# EAGLE board ANAL_1_STEP_V1_1B (EAGLE 7.6.0)
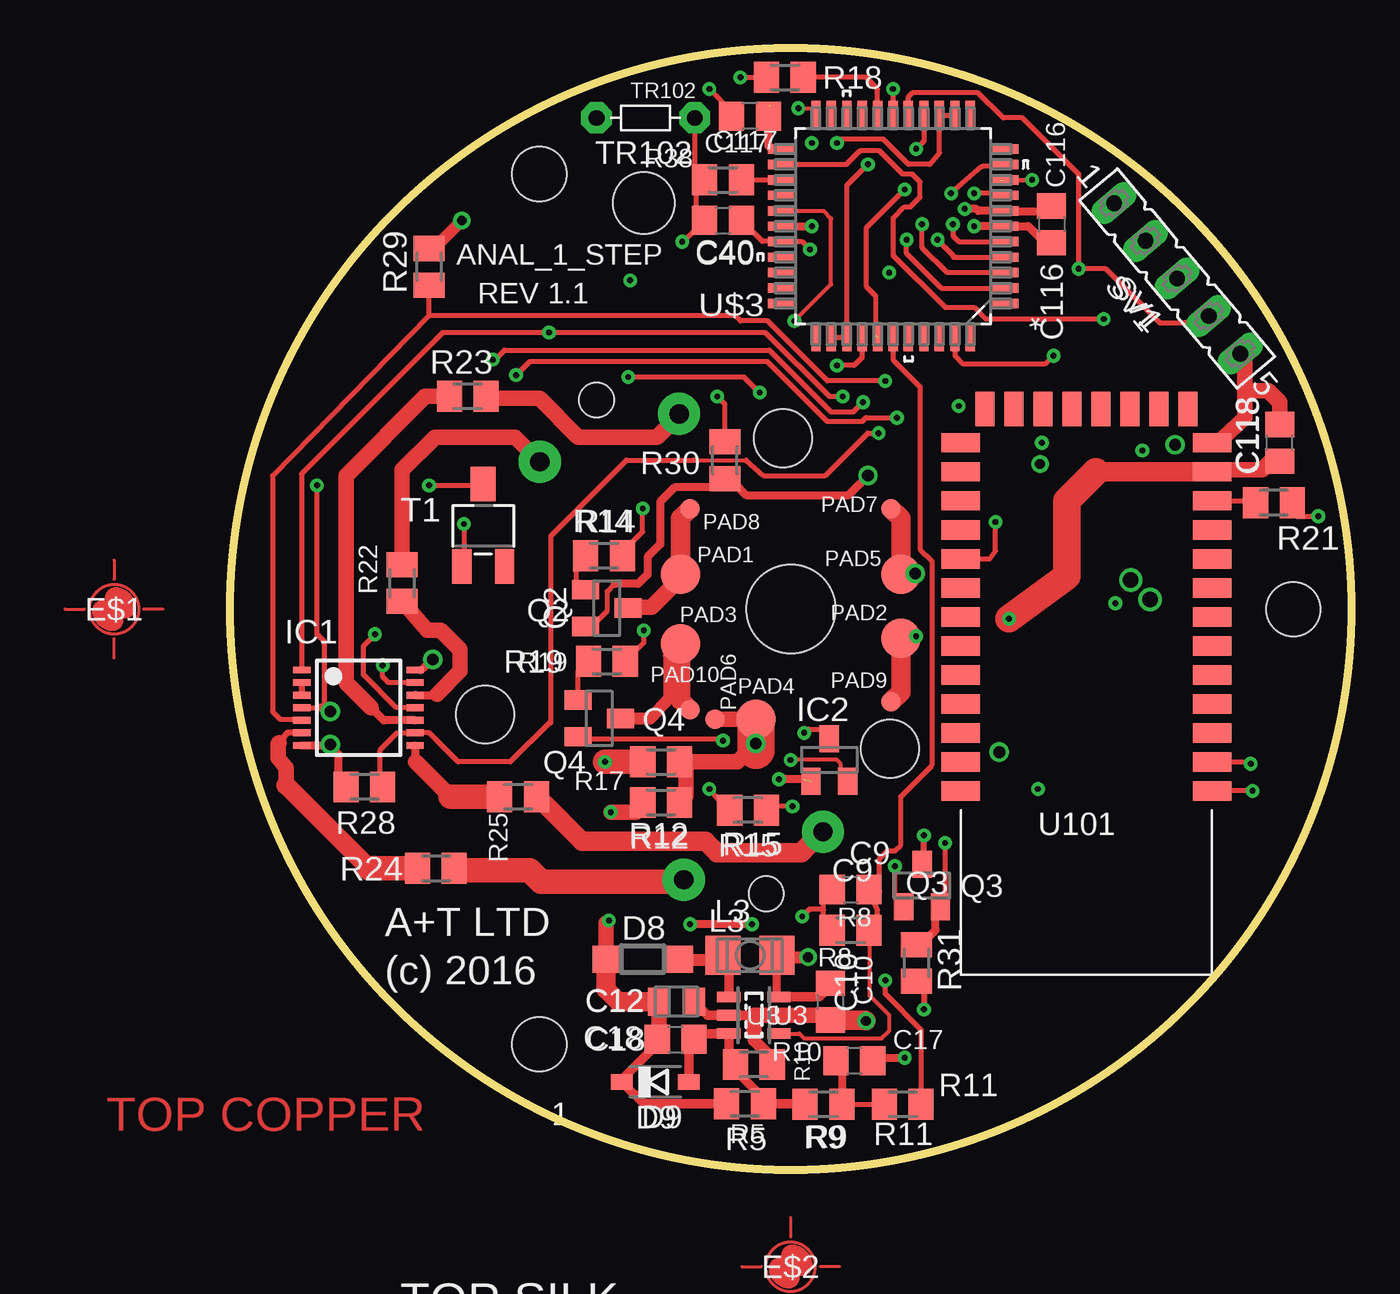
[diagram p0: board, top side]
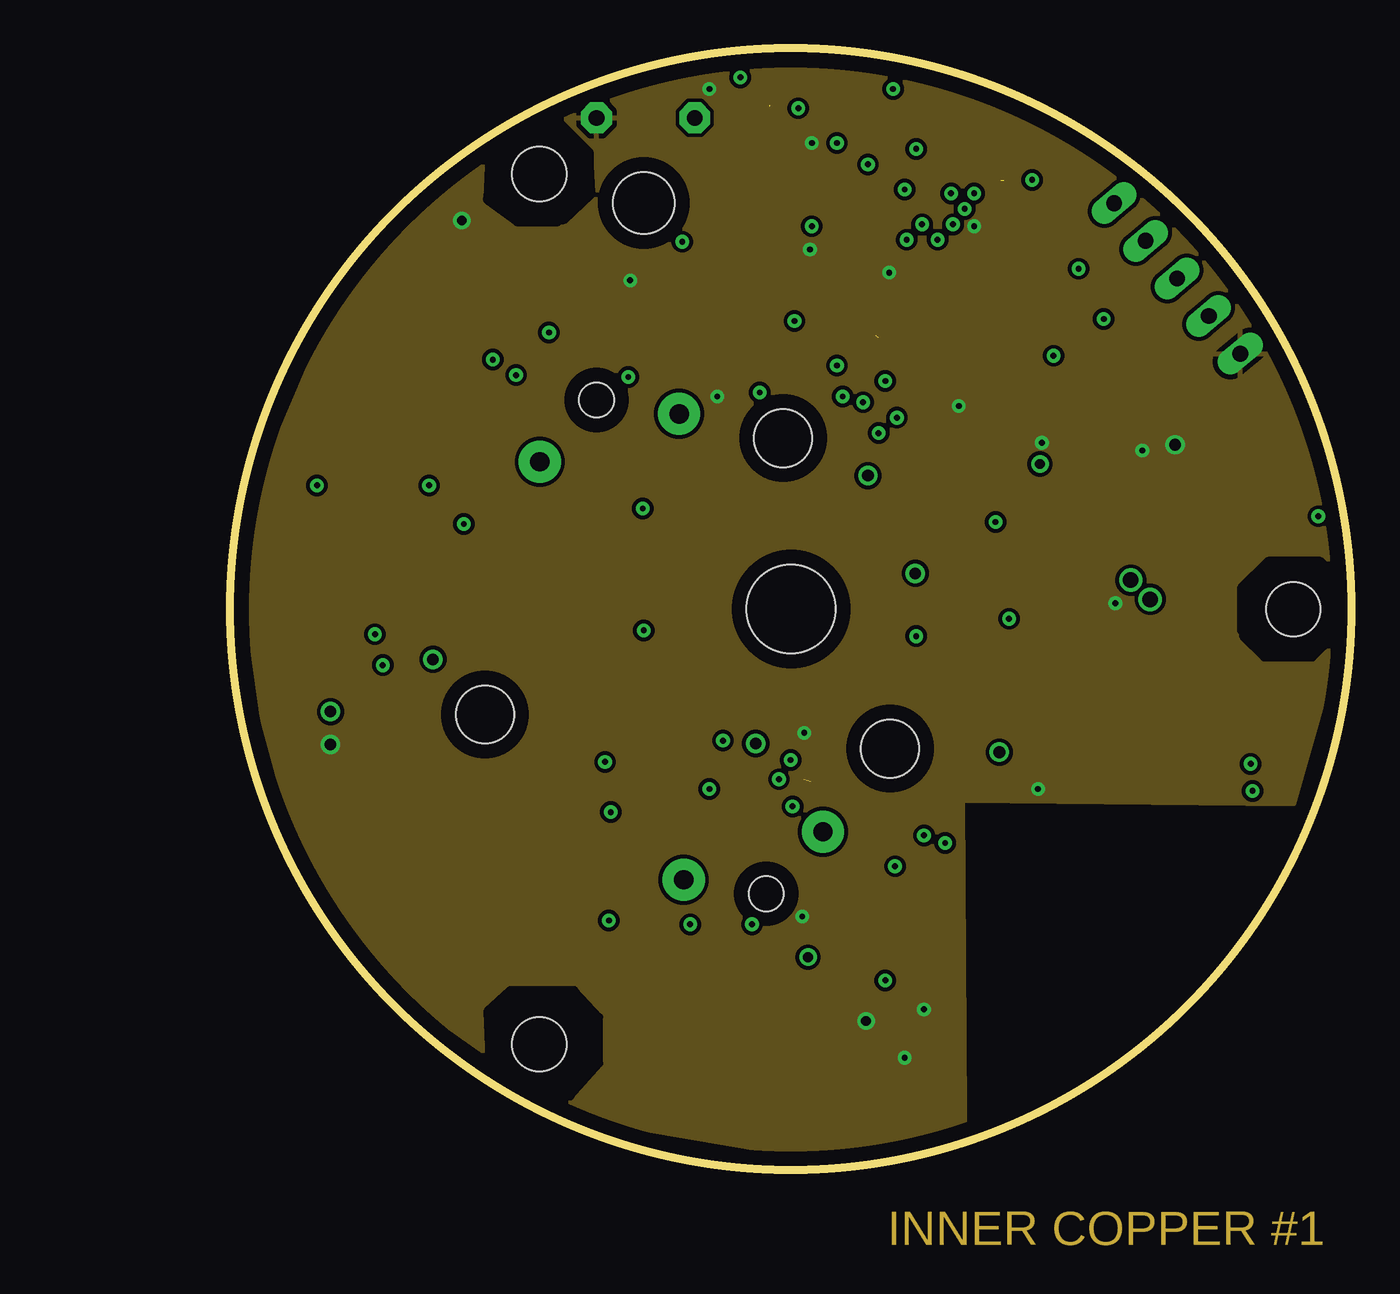
[diagram p1: board, inner layer GND]
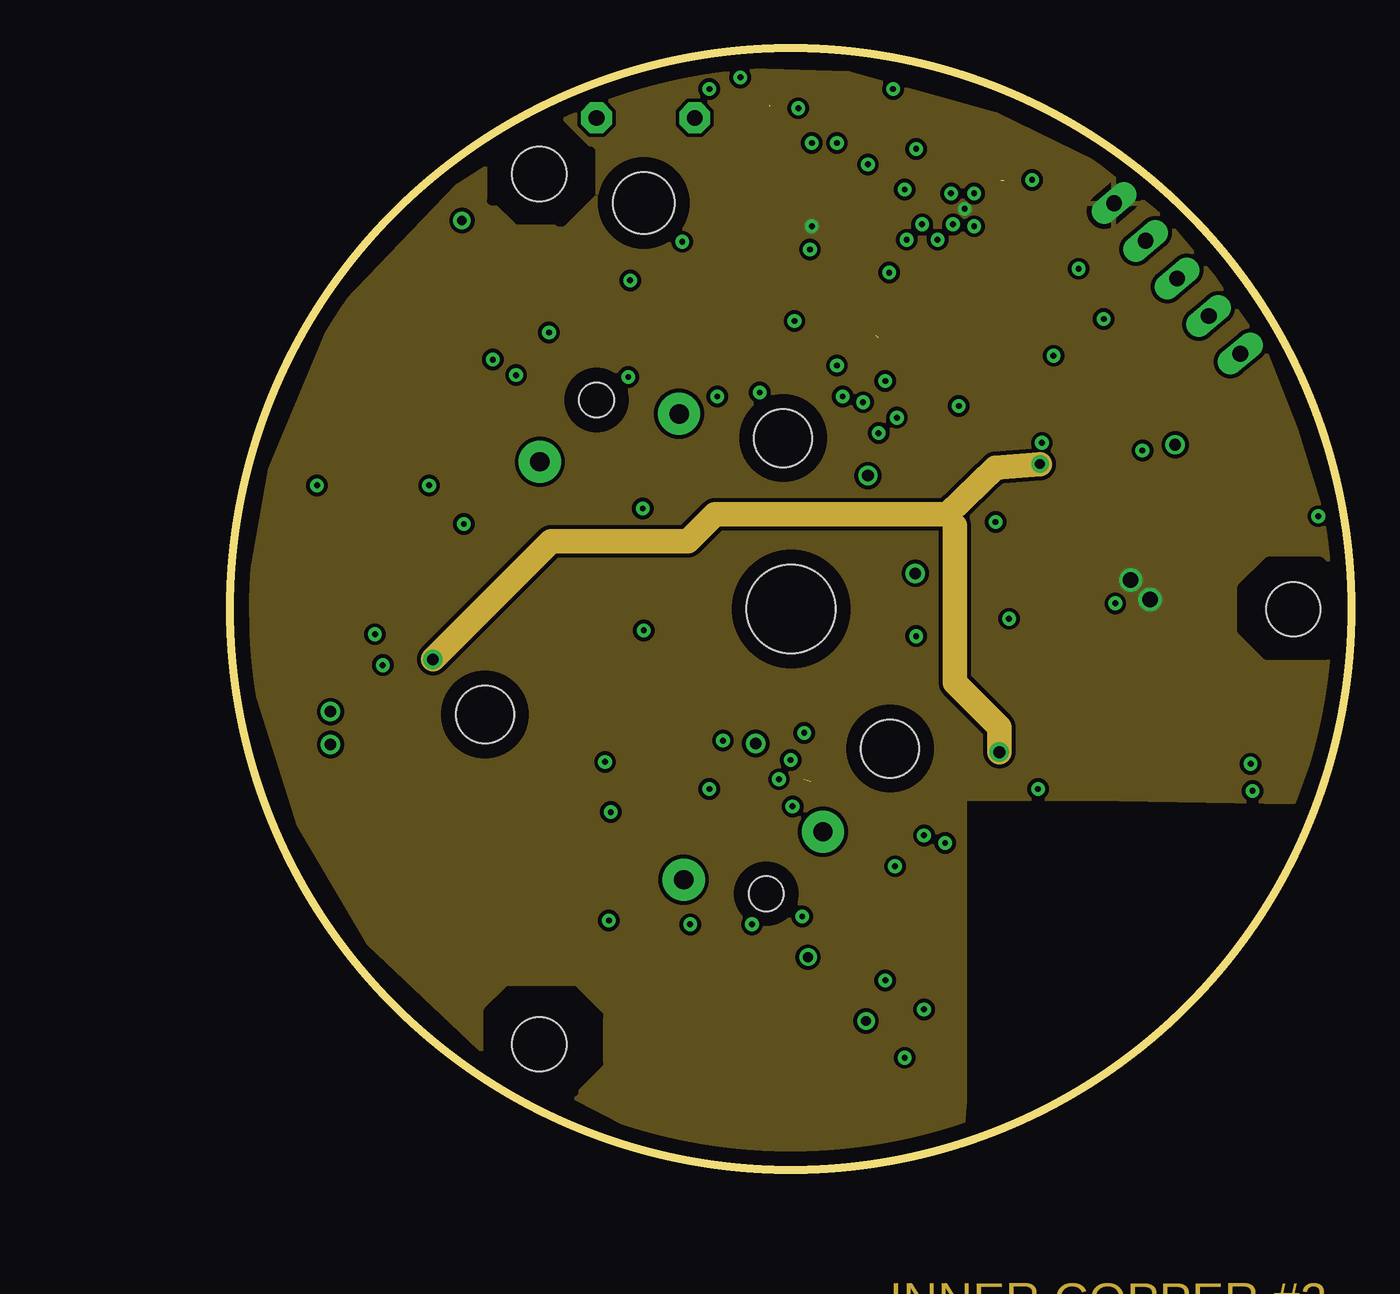
[diagram p2: board, inner layer 3V3&5V]
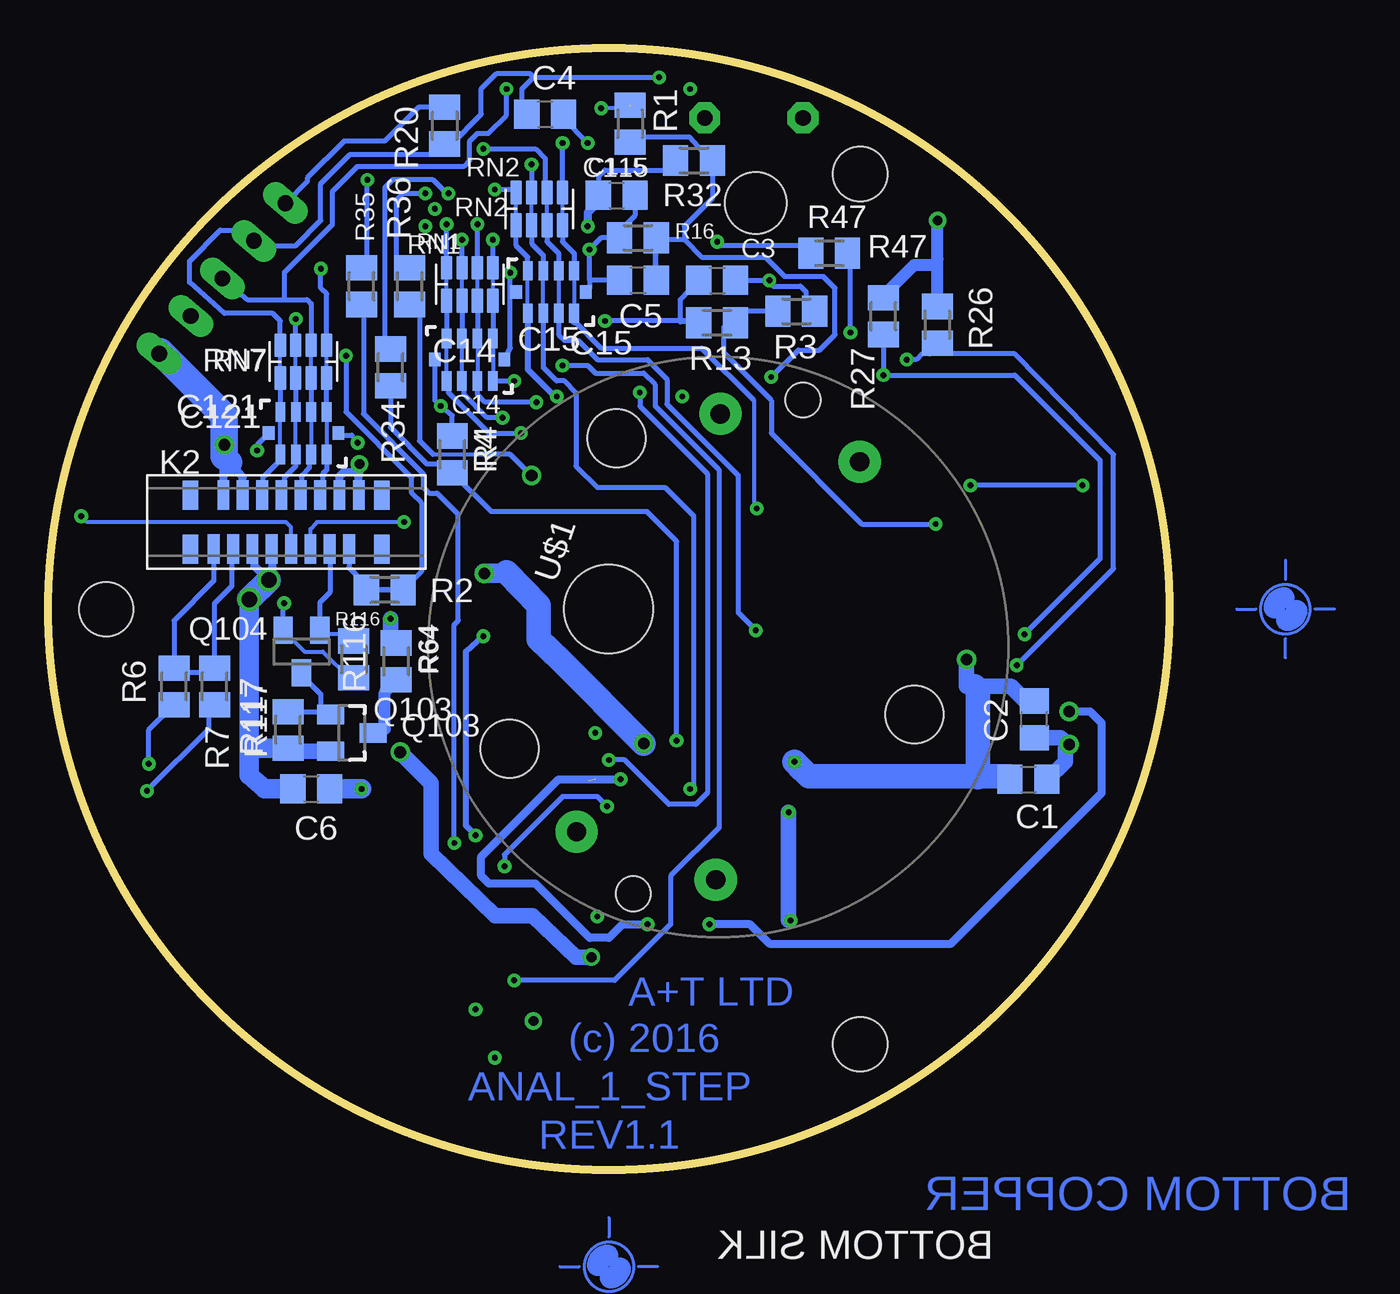
[diagram p3: board, bottom side, seen from below]

Size 58 x 58 mm. Coordinates in mm from the lower left corner, seen from the top.
Outline: circle at 29,29 radius 29
Copper layers (1*2*15*16): Top-VerticalRoutes 0.035mm / dielectric 0.5mm / GND 0.035mm / dielectric 0.5mm / 3V3&5V 0.035mm / dielectric 0.5mm / BottomnHorizontalroutes 0.035mm
Design rules "default *": minimum track width 0.2mm, minimum drill 0.3mm, track to track 6mil, track to pad 6mil, pad to pad 6mil, via to via 6mil, smd to smd 6mil, copper to edge 30mil, drill to drill 8mil, minimum pad ring 10mil, minimum via ring 8mil, stop-mask expansion 4mil, vias tented up to drill 0.31mm, thermal gap 10mil
Net classes: 0 default: width 0.2 mm, drill 0.2 mm, clearance 0.2 mm; 1 GND: width 0.2 mm, drill 0.2 mm, clearance 0.2 mm to class 0, clearance 0.2 mm; 2 5V: width 0.2 mm, drill 0.2 mm, clearance 0.2 mm to class 0, clearance 0.2 mm; 3 3v3: width 0.2 mm, drill 0.2 mm, clearance 0.2 mm to class 0, clearance 0.2 mm to class 1, clearance 0.2 mm to class 2, clearance 0.2 mm
Holes 3.2 mm at 21.4,50
Holes 2.8 mm at 16,51.5 16,6.5 55,29

## Footprints (pad centres in the part's own frame; a part is rotated, then mirrored left to right if it is on the bottom)
C0805 = smd 1.3 x 1.5: 1 -0.95,0; 2 0.95,0
CAPC2012X94N = smd 1.118 x 1.448: 1 -0.914,0; 2 0.914,0
NFA31C-MURATA-SHORTED = smd 0.6 x 0.7: 1 -1.8,0; 2 1.8,0 | smd 0.5 x 1: 3 -1.2,-1.1; 4 -0.4,-1.1; 5 0.4,-1.1; 6 1.2,-1.1; 7 -1.2,1.1; 8 -0.4,1.1; 9 0.4,1.1; 10 1.2,1.1
SOD123 = smd 1.4 x 1.4: A 1.9,0; C -1.9,0
SOD3616X135N-(SOD123) = smd 1.1 x 0.8: A 1.735,0 | smd 1.11 x 0.8: C -1.735,0
TSSOP14 = smd 0.35 x 0.9: 1 -1.95,-2.925; 2 -1.3,-2.925; 3 -0.65,-2.925; 4 0,-2.925; 5 0.65,-2.925; 6 1.3,-2.925; 7 1.95,-2.925; 8 1.95,2.925; 9 1.3,2.925; 10 0.65,2.925; 11 0,2.925; 12 -0.65,2.925; 13 -1.3,2.925; 14 -1.95,2.925
SOT23 = smd 1 x 1.4: 1 -0.95,-1.1; 2 0.95,-1.1; 3 0,1.1
52559-1652 = smd 0.61 x 1.524: 1 -3.54,-1.4; 2 -3.04,1.4; 3 -2.54,-1.4; 4 -2.04,1.4; 5 -1.54,-1.4; 6 -1.04,1.4; 7 -0.54,-1.4; 8 -0.04,1.4; 9 0.46,-1.4; 10 0.96,1.4; 11 1.46,-1.4; 12 1.96,1.4; 13 2.46,-1.4; 14 2.96,1.4; 15 3.46,-1.4; 16 3.96,1.4 | smd 0.8 x 1.5: Z1 -4.74,1.4; Z2 -4.74,-1.4; Z3 5.16,-1.4; Z4 5.16,1.4
L3225P = smd 1.8 x 2: 1 -1.4,0; 2 1.4,0
SMD2MMROUND = smd 2.032 x 2.032: 1 0,0
SMD1MMROUND = smd 1.016 x 1.016: 1 0,0
M0805 = smd 1.3 x 1.6: 1 -0.95,0; 2 0.95,0
RESCAV80P325X165X90-8M-SHORTED = smd 0.6 x 1.22: 1 -1.2,-0.85; 2 -0.4,-0.85; 3 0.4,-0.85; 4 1.2,-0.85 | smd 0.6 x 1.25: 5 1.2,0.85; 6 0.4,0.85; 7 -0.4,0.85; 8 -1.2,0.85
FE05-1 = drill 0.813 long: 1 -5.08,0; 2 -2.54,0; 3 0,0; 4 2.54,0; 5 5.08,0
SFH3400 = smd 1 x 1.8: 1 -1.1,-1.3; 2 1.1,-1.3 | smd 1.3 x 1.8: 3 0,2.97
R-5 = drill 0.813 pad 1.6 octagon: 1 -2.54,0; 2 2.54,0
SOT23-5 = smd 0.55 x 1.2: 1 -0.95,-1.3; 2 0,-1.3; 3 0.95,-1.3; 4 0.95,1.3; 5 -0.95,1.3
BLUETOOTH_SMD = smd 2 x 1: 1 0,0; 2 0,-1.5; 3 0,-3; 4 0,-4.5; 5 0,-6; 6 0,-7.5; 7 0,-9; 8 0,-10.5; 9 0,-12; 10 0,-13.5; 11 0,-15; 12 0,-16.5; 13 0,-18; 22 13,-18; 23 13,-16.5; 24 13,-15; 25 13,-13.5; 26 13,-12; 27 13,-10.5; 28 13,-9; 29 13,-7.5; 30 13,-6; 31 13,-4.5; 32 13,-3; 33 13,-1.5; 34 13,0 | smd 1 x 1.8: 14 1.25,-19.75; 15 2.75,-19.75; 16 4.25,-19.75; 17 5.75,-19.75; 18 7.25,-19.75; 19 8.75,-19.75; 20 10.25,-19.75; 21 11.75,-19.75
X25_5X9 = drill 1 pad 2.184: P$1 -11.43,3.81; P$2 -11.43,-3.81; P$3 11.43,3.81; P$4 11.43,-3.81 | hole 4.6: 0,6 | hole 3: 8.49,8.49; -8.49,8.49; 0,-10.75 | hole 1.8: -13.5,0; 13.5,0
QFP80P1200X1200X120-44N = smd 1.473 x 0.483: 1 -5.74,3.988; 2 -5.74,3.2; 3 -5.74,2.388; 4 -5.74,1.6; 5 -5.74,0.787; 6 -5.74,0; 7 -5.74,-0.787; 8 -5.74,-1.6; 9 -5.74,-2.388; 10 -5.74,-3.2; 11 -5.74,-3.988; 23 5.74,-3.988; 24 5.74,-3.2; 25 5.74,-2.388; 26 5.74,-1.6; 27 5.74,-0.787; 28 5.74,0; 29 5.74,0.787; 30 5.74,1.6; 31 5.74,2.388; 32 5.74,3.2; 33 5.74,3.988 | smd 0.483 x 1.473: 12 -3.988,-5.74; 13 -3.2,-5.74; 14 -2.388,-5.74; 15 -1.6,-5.74; 16 -0.787,-5.74; 17 0,-5.74; 18 0.787,-5.74; 19 1.6,-5.74; 20 2.388,-5.74; 21 3.2,-5.74; 22 3.988,-5.74; 34 3.988,5.74; 35 3.2,5.74; 36 2.388,5.74; 37 1.6,5.74; 38 0.787,5.74; 39 0,5.74; 40 -0.787,5.74; 41 -1.6,5.74; 42 -2.388,5.74; 43 -3.2,5.74; 44 -3.988,5.74

## Placement (x,y rotation side)
C1  10u  [C0805]  7.3,20.2 0 bottom
C2  100n  [C0805]  7,23.3 90 bottom
C3  1n  [C0805]  23.4,46 0 bottom
C4  1n  [C0805]  32.3,54.6 0 bottom
C5  DNF  [C0805]  27.5,46 180 bottom
C6  100n  [C0805]  44.4,19.7 0 bottom
C9  1n  [C0805]  32.1,14.5 0 top
C10  10u  [C0805]  31.05,8.7 270 top
C12  1u 35V  [CAPC2012X94N]  23.1,8.7 180 top
C14  DNF  [NFA31C-MURATA-SHORTED]  36.2,41.9 0 bottom
C15  DNF  [NFA31C-MURATA-SHORTED]  32,45.4 0 bottom
C17  DNF  [C0805]  32.3,5.65 0 top
C18  22p  [C0805]  23.05,6.75 0 top
C40  100n  [C0805]  25.5,49.1 0 top
C115  100n  [C0805]  28.6,50.4 0 bottom
C116  100n  [C0805]  42.5,48.9 270 top
C117  10u  [C0805]  26.9,54.5 180 top
C118  100n  [C0805]  54.3,37.6 90 top
C121  DNF  [NFA31C-MURATA-SHORTED]  44.8,38.1 0 bottom
D8  MBR0530  [SOD123]  21.35,10.9 0 top
D9  24V 500mW  [SOD3616X135N-(SOD123)]  22,4.55 0 top
E$1  [PASS-ROUND]  -6,29 0 top  (outside the outline)
E$2  [PASS-ROUND]  29,-5 0 top  (outside the outline)
E$3  [PASS-ROUND]  63.95,29 0 top  (outside the outline)
IC1  SN74ACT14PW  [TSSOP14]  6.65,23.9 270 top
IC2  A1126LLHLT-T  [SOT23]  31,21.2 0 top
K2  Molex 52559-1652  [52559-1652]  45.9,33.5 0 bottom
L3  1224AS-H-100M  [L3225P]  26.9,11.1 180 top
PAD1  [SMD2MMROUND]  23.3,30.8 0 top
PAD2  [SMD2MMROUND]  34.7,27.5 0 top
PAD3  [SMD2MMROUND]  23.3,27.2 0 top
PAD4  [SMD2MMROUND]  27.2,23.3 0 top
PAD5  [SMD2MMROUND]  34.7,30.8 0 top
PAD6  [SMD1MMROUND]  25.1,23.3 0 top
PAD7  [SMD1MMROUND]  34.2,34.2 0 top
PAD8  [SMD1MMROUND]  23.8,34.2 0 top
PAD9  [SMD1MMROUND]  34.2,24.2 0 top
PAD10  [SMD1MMROUND]  23.8,23.8 0 top
Q2  BSS123  [SOT23]  19.5,29.05 270 top
Q3  BSS123  [SOT23]  35.8,14.7 0 top
Q4  BSS123  [SOT23]  19.1,23.35 270 top
Q103  NTR2101P  [SOT23]  42.3,22.6 270 bottom
Q104  BSS123  [SOT23]  44.9,26.8 180 bottom
R1  100R  [M0805]  27.9,54.1 90 bottom
R2  DNF  [M0805]  40.6,29.99 0 bottom
R3  1k  [M0805]  19.3,44.4 180 bottom
R4  100R  [M0805]  37.1,37 270 bottom
R5  2M2  [M0805]  26.64,3.41 0 top
R6  100R  [M0805]  51.5,25 270 bottom
R7  100R  [M0805]  49.4,25 270 bottom
R8  100k  [M0805]  32.1,12.4 180 top
R9  DNF  [M0805]  30.7,3.4 180 top
R10  160k  [M0805]  27.1,5.45 0 top
R11  DNF  [M0805]  34.8,3.4 180 top
R12  100R  [M0805]  22.3,19 180 top
R13  100R  [M0805]  23.4,43.8 0 bottom
R14  1k  [M0805]  19.35,31.75 0 top
R15  1k  [M0805]  26.8,18.6 0 top
R16  DNF  [M0805]  27.5,48.2 180 bottom
R17  DNF  [M0805]  22.3,21.1 180 top
R18  100R  [M0805]  28.7,56.5 180 top
R19  1k  [M0805]  19.5,26.3 180 top
R20  10k  [M0805]  37.5,54 90 bottom
R21  1R  [M0805]  54,34.5 0 top
R22  10R  [M0805]  8.9,30.35 90 top
R23  10R  [M0805]  12.3,40 0 top
R24  10R  [M0805]  10.65,15.6 180 top
R25  10R  [M0805]  14.9,19.3 180 top
R26  10k  [M0805]  12,43.7 270 bottom
R27  10k  [M0805]  14.8,44.15 270 bottom
R28  10k  [M0805]  6.95,19.8 0 top
R29  10k  [M0805]  10.3,46.7 270 top
R30  59R  [M0805]  25.6,36.7 270 top
R31  59R  [M0805]  35.5,10.7 90 top
R32  10k  [M0805]  24.6,52.2 180 bottom
R34  100R  [M0805]  40.3,41.5 270 bottom
R35  100R  [M0805]  41.8,45.7 270 bottom
R36  100R  [M0805]  39.3,45.7 270 bottom
R38  100R  [M0805]  25.5,51.2 180 top
R47  10k  [M0805]  17.6,47.4 0 bottom
R64  1R  [M0805]  40,26.3 270 bottom
R116  100k  [M0805]  42.2,26.4 90 bottom
R117  100k  [M0805]  45.6,22.75 270 bottom
RN1  DNF  [RESCAV80P325X165X90-8M-SHORTED]  36.2,45.8 180 bottom
RN2  DNF  [RESCAV80P325X165X90-8M-SHORTED]  32.6,49.7 180 bottom
RN7  DNF  [RESCAV80P325X165X90-8M-SHORTED]  44.8,41.8 180 bottom
SV1  NOT FITTED  [FE05-1]  49,46.1 310 top
T1  SFH3400-2/3  [SFH3400]  13.1,32.5 0 top
TR102  NTCLE100E3103JB0  [R-5]  21.5,54.4 180 top
U3  TPS61041DBVR  [SOT23-5]  27.1,8 270 top
U101  HC_05  [BLUETOOTH_SMD]  50.8,19.6 180 top
U$1  X25_5X9  [X25_5X9]  23.35,27.05 71 bottom
U$3  PIC18F46J13-I/PT  [QFP80P1200X1200X120-44N]  34.3,48.8 180 top

## Library data of the parts
C1-C6 C9 C10 C17 C18 C40 C115-C118 L3 R1-R32 R34-R36 R38 R47 R64 R116 R117 = rcl
C12 = Capacitors_AandT; MANUFACTURER: TAIYO YUDEN; MPN: GMK212B7105KG-T; SUPPLIER: RS; SUPPLIER_PART_NOS: 758-3313
C14 C15 C121 = Capacitors_AandT; NOTE: PINS SHORTED
D8 = diode
D9 = Diodes_AnT; FARNELL: 1431284; MANUFACTURER: ON-SEMI; MFN: MMSZ5252BT1G
E$1-E$3 = marks
IC1 = 74xx-eu
IC2 K2 PAD1-PAD10 T1 = AWR
Q2-Q4 Q104 = transistor-small-signal
Q103 = Transistor_AandT; FARNELL: 1431297; MANUFACTURER: ON-SEMI; MPN: NTR2101P; PACKAGE: SOT23; RS: 780-4739 PK25
RN1 RN2 RN7 = Resistor-AandT; FARNELL: 2060157; MANUFACTURER: PANASONIC; MPN: EXBV8V101JV; RS: 665-2887
SV1 = con-lsta; OC_FARNELL: unknown; OC_NEWARK: unknown
TR102 = discrete
U3 = v-reg-3; MANUFACTURER: TI; MPN: TPS61041DBVR; PACKAGE: SOT23-5
U101 = Bluetooth
U$1 = x25_5x9
U$3 = AWR; MPN: PIC18F46J13; PACKAGE: TQFP-44; SUPPLIER: Microchip

## Nets
+3V3 [3v3]: C6.1 C115.1 C116.1 K2.5 K2.7 Q103.2 R20.2 R32.2 R117.2 SV1.1 U$3.7 U$3.28
+5V [5V]: C1.1 C2.2 C10.1 IC1.14 K2.14 K2.16 L3.1 R17.2 U3.5
AMB_LIGHT: C3.1 R13.1 U$3.27
AN8: R34.1 U$3.10
AN10: R35.1 U$3.9
AN12: R36.1 U$3.8
BL_ADJUST: R11.1 U$3.37
BL_ENABLE: C9.2 R8.1 U3.4 U$3.39
BLUETOOTH_PWR: K2.13 Q104.1 R116.2
CK_STEP: RN7.1 SV1.4 U$3.16
DI_STEP: RN7.2 SV1.3 U$3.17
DO_STEP: K2.15 R2.1 R2.2 U$3.43
GND [GND]: C1.2 C2.1 C3.2 C4.2 C5.2 C6.2 C9.1 C10.2 C12.1 C14.1 C14.2 C15.1 C15.2 C17.2 C40.2 C115.2 C116.2 C117.2 C118.2 C121.1 C121.2 IC1.7 IC2.3 K2.2 K2.4 Q104.2 R3.1 R4.1 R8.2 R10.2 R16.2 R26.1 R27.1 R28.1 R29.1 R30.1 R31.1 R116.1 SV1.5 TR102.2 U3.2 U101.13 U$3.6 U$3.29
HALL_SENSOR_+V: IC1.4 IC2.1 T1.3
KEY_BT: K2.11 U101.26
LCD_FB: C18.2 D9.A R5.2 R9.2 R10.1 U3.3
LCD_SW: D8.A L3.2 U3.1
LED1: RN2.1 U$3.13 U$3.14
LEDVOLTS: C12.2 C18.1 D8.C D9.C R5.1 R12.2
MCLR: C4.1 R18.2 R20.1 RN7.4 SV1.2
MOTOR1: RN1.1 U$3.2
MOTOR1_2: C14.6 IC1.5 R29.2
MOTOR2: RN1.2 U$3.3
MOTOR2_2: C14.5 IC1.13 R26.2
MOTOR3: RN1.3 U$3.4
MOTOR3_2: C14.4 IC1.11 R27.2
MOTOR4: RN1.4 U$3.5
MOTOR4_2: C14.3 IC1.9 R28.2
MOTOR6: RN2.2 U$3.15
MOTOR7: RN2.3 U$3.35 U$3.36
N$1: C15.7 RN2.5
N$2: C5.1 IC2.2 R1.1 R16.1 R32.1
N$3: C15.10 RN2.8
N$4: R21.1 U101.11
N$5: K2.1 R6.1
N$6: K2.3 R7.1
N$10: R1.2 U$3.22
N$11: PAD3.1 PAD10.1 Q4.3
N$13: C121.6 K2.12
N$15: C121.5 K2.10
N$16: R22.2 U$1.P$4
N$17: C121.10 RN7.8
N$18: C121.9 RN7.7
N$19: C121.8 RN7.6
N$21: PAD4.1 PAD5.1 PAD6.1 PAD7.1 R12.1 R17.1
N$24: C121.3 K2.6
N$26: C121.4 K2.8
N$27: IC1.2 IC1.3
N$28: C15.9 RN2.7
N$29: C15.8 RN2.6
N$30: R23.2 U$1.P$3
N$32: R38.1 U$3.25
N$34: R25.1 U$1.P$1
N$36: R24.1 U$1.P$2
N$37: PAD2.1 PAD9.1 Q3.3
N$38: Q4.1 R19.2
N$39: R3.2 R13.2 T1.1
N$40: PAD1.1 PAD8.1 Q2.3
N$41: IC1.12 R22.1
N$42: IC1.10 R23.1
N$43: Q3.1 R15.2
N$44: Q2.1 R14.1
N$45: IC1.8 R25.2
N$47: R18.1 U$3.18
N$48: IC1.6 R24.2
N$57: C14.10 RN1.8
N$59: C14.9 RN1.7
N$62: C14.8 RN1.6
N$64: C121.7 RN7.5
N$65: Q3.2 R31.2 R35.2
N$67: C14.7 RN1.5
N$70: Q4.2 R4.2 R34.2
N$71: C118.1 R64.1 U101.12
N$74: Q2.2 R30.2 R36.2
N$77: C17.1 R9.1 R11.2
N$79: Q103.1 Q104.3 R117.1
N$123: Q103.3 R64.2
PWMB: C15.6 R14.2
PWMG: C15.5 R19.1
PWMR: C15.4 R15.1
RST_BT: K2.9 R21.2
RX_BT: R6.2 U101.2
SENS_ENABLE: RN2.4 U$3.38
SENSOR_ENABLE: C15.3 IC1.1 R47.2
SS1: RN7.3 U$3.24
TEMPERATURE: C40.1 R38.2 R47.1 TR102.1
TX_BT: R7.2 U101.1
VDDCORE: C117.1 U$3.23

## Tracks (layer width: path | path; a pad name or v marks a point on that pad's centre or on a via)
+3V3  (via drill 0.3, 0.8)
  Top-VerticalRoutes 0.254: U$3.7 40.03,49.6
  Top-VerticalRoutes 0.406: U$3.28 v30.1,48.8 | U$3.7 42.24,49.59 C116.1 | 40.03,49.6 38.7,49.6 38.6,49.7 v38,49.7
  BottomnHorizontalroutes 0.254: R20.2 38.85,54.95 40.6,53.2 42.7,53.2 44.6,51.3 44.6,51.13 SV1.1 | 29.5,50.4 29.5,51.4 29.2,51.7 26.05,51.7 R32.2
  BottomnHorizontalroutes 0.406: 29.5,50.4 29.6,50 | C115.1 29.55,50.35 29.6,50.3 29.6,50 | 29.6,50 30.1,49.5 v30.1,48.8 | K2.5 47.34,31.24 46.8,30.7 | 46.8,30.7 46.3,30.7 46.4,30.9 46.4,32.04 K2.7 | 46.8,30.7 v46.6,30.5
  BottomnHorizontalroutes 0.61: 45.45,21.65 R117.2
  BottomnHorizontalroutes 0.813: Q103.2 45.45,21.65
  BottomnHorizontalroutes 1.016: 47.6,21.8 R117.2 45.95,21.75 | C6.1 46.8,19.7 47.6,20.4 47.6,21.8 | 47.6,21.8 v47.6,29.5
  BottomnHorizontalroutes 1.27: v46.6,30.5 v47.6,29.5
  pour 3V3&5V: 31.7,1 25.9,1 21,2.1 12.9,6.3 7.2,11.7 3.6,17.8 1.2,25.4 1.1,30.5 2.1,36.2 5.5,44.3 11.8,50.9 19.1,55.6 26.1,56.9 32,56.7 39.6,54.6 44.7,52.1 48.2,49.3 50.9,46.1 53.5,42.4 55.1,38.3 56.5,33.8 57.1,30.2 56.9,24.2 55,19 44.5,19.2 38,19.2 38,3.6 37.9,2.3 35.6,1.5
+5V  (via drill 0.3, 0.5, 0.6)
  Top-VerticalRoutes 0.254: IC1.14 9.85,25.85
  Top-VerticalRoutes 0.406: 28.8,9 U3.5 28.4,9 28.3,9.1 L3.1 28.8,11.1 28.8,11 | 9.85,25.85 v10.5,26.4
  Top-VerticalRoutes 0.5: U3.5 30.5,8.95 30.7,9.15 C10.1
  Top-VerticalRoutes 0.61: 28.8,11 v29.9,11
  Top-VerticalRoutes 1.27: R17.2 v19.4,21.1
  3V3&5V 0.813: 37.5,33.3 36.9,33.9
  3V3&5V 1.27: v41.9,36.5 39.6,36.3 37.1,33.9 36.9,33.9 25.1,33.9 23.7,32.5 16.6,32.5 v10.5,26.4 | v39.8,21.6 39.8,22.9 37.5,25.2 37.5,33.3
  BottomnHorizontalroutes 0.406: K2.14 42.94,35.86 42.7,36.1 42,36.1 | K2.16 41.94,36.16 42,36.1 | 42,36.1 41.9,36.1 v41.9,36.5
  BottomnHorizontalroutes 0.813: v29.9,11 30.7,11 32.95,13.15 34.9,13.15 38.2,16.35 38.2,20 v39.8,21.6 | C1.1 8.25,20.35 | v10.5,26.4 10.5,25 10.1,25 8.2,25 7.35,24.15 C2.2
  BottomnHorizontalroutes 1.27: 19,20.7 v19.4,21.1 18.65,20.35 9.85,20.35 | 8.25,20.35 9.85,20.35 | 9.85,20.35 9.9,20.3 9.9,24.8 10.1,25
AMB_LIGHT  (via drill 0.3 pad 0.25)
  Top-VerticalRoutes 0.2: v29.2,43.9 31.1,45.8 31.1,49.2 30.71,49.59 U$3.27
  BottomnHorizontalroutes 0.254: v29.2,43.9 25.05,43.9 R13.1 25.3,43.85 25.3,45 C3.1
AN8  (via drill 0.3)
  Top-VerticalRoutes 0.254: U$3.10 39.8,51.9 38.9,51.9 v37.3,50.5
  BottomnHorizontalroutes 0.254: v37.3,50.5 37.4,50.5 38.1,51.2 40.2,51.2 40.6,50.8 40.6,43 | 40.6,43 40.6,42.95 R34.1 40.6,43 | 40.6,43 40.7,43
AN10  (via drill 0.3)  (1 unrouted)
  Top-VerticalRoutes 0.254: 39.89,51.19 v41.5,51.2
  BottomnHorizontalroutes 0.254: R35.1 41.5,46.55 v41.5,51.2
AN12  (via drill 0.3)
  Top-VerticalRoutes 0.254: U$3.8 39.5,50.4 | 39.5,50.4 | 39.5,50.4 39.5,50.5 v38.5,50.5
  BottomnHorizontalroutes 0.254: v38.5,50.5 39.65,50.5 39.69,50.46 39.69,50.45 40,50.16 40,47.1 R36.1
BL_ADJUST  (via drill 0.3)
  Top-VerticalRoutes 0.254: R11.1 35.75,7.25 33.9,9.1 v33.9,9.8 | U$3.37 32.7,42 32.3,41.6 v31.4,41.6
  BottomnHorizontalroutes 0.254: v33.9,9.8 28.7,9.8 25.8,12.7 25.8,15.2 23.3,17.7 23.3,36.2 26.6,39.5 26.6,40.6 27.2,41.2 29.7,41.2 30.1,41.6 v31.4,41.6
BL_ENABLE
  Top-VerticalRoutes 0.2: U3.4 29.45,7.05 29.7,6.8 33.7,6.8 34.1,7.2 34.1,8 33.1,9 33.1,11.75 R8.1
  Top-VerticalRoutes 0.254: R8.1 33.1,11.8 33.5,12.2 33.5,13.45 C9.2 33.1,13.9 33.6,14.4 33.6,16.1 34,16.5 34.4,16.5 34.7,16.8 34.7,19.3 36.3,20.9 36.3,31.5 35.7,32.1 35.7,40.5 34.3,41.9 U$3.39
BLUETOOTH_PWR
  BottomnHorizontalroutes 0.2: R116.2 42.35,27.35 42.7,27.7 43.75,27.7 Q104.1
  BottomnHorizontalroutes 0.254: K2.13 43.4,31.74 43.4,29.9 43.95,29.35 Q104.1
CK_STEP  (via drill 0.3)
  Top-VerticalRoutes 0.254: SV1.4 49.4,43.8 48.1,43.8 45.3,46.6 v43.9,46.6 43.9,51.5 41,54.4 40,54.4 38.7,55.7 35.3,55.7 35.1,55.5 35.1,54.55 U$3.16
  BottomnHorizontalroutes 0.254: RN7.1 43.6,45.3 43.9,45.6 v43.9,46.6
DI_STEP  (via drill 0.3)
  Top-VerticalRoutes 0.254: v34.3,55.9 U$3.17
  BottomnHorizontalroutes 0.254: SV1.3 47.7,45 45.8,45 | 45.8,45 44.62,45 44.42,44.8 44.4,44.8 RN7.2 | 45.8,45 45.8,46.4 43.3,48.9 43.3,50.6 42,51.9 36.5,51.9 36.2,52.2 36.2,53.2 35.8,53.6 35.24,53.6 U$3.17 v34.3,55.9
DO_STEP  (via drill 0.3)
  Top-VerticalRoutes 0.254: U$3.43 37.5,42.1 37.9,41.7 42.2,41.7 v42.6,42.1
  BottomnHorizontalroutes 0.254: v42.6,42.1 42.6,39.2 39.2,35.8 39.2,35 38.7,34.5 38.7,30.94 R2.2 R2.1 40.26,30 41.3,30 42.44,31.14 K2.15
GND  (via drill 0.3, 0.3 pad 0.25, 0.5, 0.6)
  Top-VerticalRoutes 0.2: R8.2 31.15,12.05 30.7,12.5 | 51.96,41.9 SV1.5 | v29.7,22.6 29.9,22.8 | 30.7,22.8 31,22.5 IC2.3
  Top-VerticalRoutes 0.254: 30.7,12.5 30.7,13.45 | v29.6,13.1 30,13.5 30.65,13.5 30.7,13.45 | R30.1 25.6,39.6 v25.2,40 | 29.9,22.8 30.7,22.8 | 30.7,13.45 30.7,14.05 C9.1 | C40.2 27.54,48.01 U$3.29 29.59,48.01 v30,47.6 | C117.2 25.95,54.75 v24.8,55.9
  Top-VerticalRoutes 0.305: R31.1 35.9,10.25 v35.9,8.3
  Top-VerticalRoutes 0.406: 24.21,8.5 C12.1 24.01,8.69 | C17.2 33.4,5.8 v34.9,5.8 | C116.2 42.25,48.2 41.9,48.2 41.3,48.8 U$3.6 v38.5,48.8 | IC1.7 5.05,21.95 v5.2,22 5.3,21.8 5.6,21.5 5.6,20.2 R28.1
  Top-VerticalRoutes 0.5: 24.01,8.69 24.7,8 U3.2 27.1,8
  Top-VerticalRoutes 0.61: 28.05,5.75 27.1,6.7 27.1,7.2 | R29.1 10.55,47.65 v12,49.1
  Top-VerticalRoutes 0.813: R10.2 28.05,5.75 | 27.1,7.2 27.1,8 31,8 31.05,7.95 C10.2 | U101.13 51,37.5 52.5,38.9 52.5,40.3 | 52.5,40.3 52.5,41.97 SV1.5 | C118.2 54.3,39.7 53.7,40.3 52.5,40.3
  Top-VerticalRoutes 1.016: C10.2 32.85,7.75 v32.9,7.7
  BottomnHorizontalroutes 0.2: Q104.2 44.75,26.8 43.8,26.8 42.45,25.45 R116.1
  BottomnHorizontalroutes 0.254: C14.1 38,39.8 v37.7,39.5 37.1,39 R4.1 | C14.2 34.1,42.5 34.1,45.2 | C4.2 31.35,54.35 v30.1,53.1 | C121.1 47.2,37.5 v47.2,37.2 | Q104.2 45.85,29.25 v45.8,29.3 | C3.2 v20.7,46 20.8,46 20.5,45.7 19.1,45.7 18.8,45.4 18.8,44.65 R3.1 | C5.2 30,46 | 30,46 v30,47.6 29.4,48.2 R16.2 28.3,48.35 28.3,48.7 27.65,49.35 C115.2 | C121.2 42.9,38 42.3,38 v42,37.6 | C15.1 34.1,45.2 | 34.1,45.2 34.1,46.1 34,46.2 v34.1,46.4 | 30,46 30,45.6 C15.2
  BottomnHorizontalroutes 0.406: K2.4 47.94,35.84 48.6,36.6 48.6,36.3 48.94,36.44 K2.2 | 52.2,42.3 51.96,41.9 SV1.5
  BottomnHorizontalroutes 0.61: R26.1 12,47.1 | 12,47.1 v12,49.1 | R27.1 14.6,45.4 13.2,46.8 12.1,46.8 12,47.1
  BottomnHorizontalroutes 0.813: C1.2 6.31,20.2 5.4,21.11 5.4,21.8 v5.2,22 5.65,22.35 C2.1
  BottomnHorizontalroutes 1.016: C6.2 v41.8,19.7
  BottomnHorizontalroutes 1.27: 48.6,36.6 48.9,36.9
  BottomnHorizontalroutes 1.422: 52.2,42.3 48.9,39 v48.9,37.5 48.9,36.9
  pour GND: 10.5,50.5 14.3,53.1 18.8,55.3 21.9,56.3 25.3,56.9 29.2,57.2 32.4,57 36.5,56.1 40.1,54.9 44.4,52.7 46.7,50.8 50.2,47.6 52.4,45.2 54.3,41.8 55.5,38.4 56.6,34.4 57,31 56.7,24.9 55,18.9 37.9,19.1 38,2.8 38,2.3 36.6,1.8 31.8,0.9 27.2,1.1 20.1,2.3 15.4,4.5 10,8.3 6,12.8 3.2,17.8 1.7,23.3 1,28.3 1.2,33.5 2.6,38 4.7,42.9 7.2,46.7 10.1,49.8
HALL_SENSOR_+V  (via drill 0.3, 0.3 pad 0.25, 0.6)  (1 unrouted)
  Top-VerticalRoutes 0.254: IC1.4 4.7,23.9 4.9,24.1 4.9,27.3 4.5,27.7 v4.5,35.4 | v10.3,35.4 13.03,35.4 T1.3
  Top-VerticalRoutes 0.406: 29.7,20.2 v28.4,20.2 | v27,12.7 v23.8,12.7 | v5.2,23.7 5,23.7 4.7,23.9
  BottomnHorizontalroutes 0.254: v4.5,35.4 v10.3,35.4
  BottomnHorizontalroutes 0.406: v28.4,20.2 31.6,20.2 35.6,16.2 35.6,15.2 35.2,14.8 32.8,14.8 30,12 29,12 28.3,12.7 v27,12.7 | v23.8,12.7 21.7,12.7 20.7,11.7 11.3,11.7 3.5,19.5 3.5,23.1 4.1,23.7 v5.2,23.7
KEY_BT  (via drill 0.3)
  Top-VerticalRoutes 0.254: U101.26 39.3,31.6 39.6,32 v39.6,33.5
  BottomnHorizontalroutes 0.2: v39.6,33.5 44.1,33.5 44.44,33.14 K2.11
LCD_FB
  Top-VerticalRoutes 0.406: U3.3 25.8,7.1
  Top-VerticalRoutes 0.5: R9.2 29.94,3.41 R5.2 27.3,3.7 27.3,4 26.25,5.05 26.15,5.05 R10.1 25.8,5.8 U3.3 24.3,7.05 C18.2 23.73,6.49 D9.A
LCD_SW
  Top-VerticalRoutes 0.2: 25.35,10.85 L3.2
  Top-VerticalRoutes 0.406: L3.2 25.8,11 | 23.25,10.85 D8.A
  Top-VerticalRoutes 0.5: 25.8,11 U3.1
  Top-VerticalRoutes 0.61: 25.35,10.85 23.25,10.85
LED1  (via drill 0.3)
  Top-VerticalRoutes 0.254: U$3.13 U$3.14 36.7,54.63 36.7,52.6 36.2,52 35.1,52 33.8,53.3 31.6,53.3 v31.4,53.1
  BottomnHorizontalroutes 0.254: RN2.1 v31.4,53.1
LEDVOLTS  (via drill 0.3)
  Top-VerticalRoutes 0.406: v19.6,12.9 19.45,12.75
  Top-VerticalRoutes 0.5: C18.1 21.7,6.35 21.7,6.1 20.27,4.67 D9.C 21.41,3.41 R5.1
  Top-VerticalRoutes 0.813: C12.2 22.19,6.84 C18.1 | v19.7,18.5 21,18.5 21,18.65 R12.2 | 19.45,12.75 D8.C
  Top-VerticalRoutes 1.016: D8.C 19.45,9.35 20.1,8.7 C12.2
  BottomnHorizontalroutes 0.406: 19.7,12.9 v19.6,12.9
  BottomnHorizontalroutes 0.813: v19.7,18.5 19.7,12.9
MCLR  (via drill 0.3)
  Top-VerticalRoutes 0.254: v26.4,56.5 R18.2
  BottomnHorizontalroutes 0.2: 47.7,48.6 47.37,48.27 SV1.2
  BottomnHorizontalroutes 0.254: RN7.4 46,43.9 46.4,44.3 48.9,44.3 50.7,45.9 50.7,47 49.1,48.6 47.7,48.6 | SV1.2 47.12,47.8 45.2,47.8 43.9,49.1 43.9,51 42.4,52.5 38.05,52.5 R20.1 37.15,53.05 35.6,54.6 35.6,55.9 34.8,56.7 33.1,56.7 32.9,56.5 | 32.9,56.5 v26.4,56.5 | C4.1 33.25,54.85 33.5,55.3 33.5,55.9 32.9,56.5
MOTOR1  (via drill 0.3)
  Top-VerticalRoutes 0.254: U$3.2 36.8,45.6 35,47.4 v35,48.1 | U$3.2
  BottomnHorizontalroutes 0.254: RN1.1 v35,48.1
MOTOR1_2  (via drill 0.3)
  Top-VerticalRoutes 0.254: v33.9,40.8 30.9,40.8 27.8,43.9 26.4,43.9 26.1,44.2 10.3,44.2 | 10.3,44.2 2.2,35.9 2.2,23.7 2.6,23.3 3.67,23.3 IC1.5 | 10.3,44.2 R29.2
  BottomnHorizontalroutes 0.254: 35.1,40.8 C14.6 v33.9,40.8
MOTOR2  (via drill 0.3)
  Top-VerticalRoutes 0.254: U$3.3 40.03,46.4 37.1,46.4 35.8,47.7 35.8,47.75 v35.8,48.9
  BottomnHorizontalroutes 0.254: RN1.2 v35.8,48.9
MOTOR2_2  (via drill 0.3)
  Top-VerticalRoutes 0.254: IC1.13 8.2,25.2 7.9,25.5 v7.9,26.1 | v13.6,41.9 13.7,41.9 14.2,42.4 27.9,42.4 31.1,39.2 32.25,39.2 v32.75,39.7
  BottomnHorizontalroutes 0.254: v32.75,39.7 35.4,39.7 35.8,40.1 C14.5 | v7.9,26.1 2.9,31.1 2.9,37 8,42.2 12.4,42.2 | 12.4,42.2 12.8,42.2 13.1,41.9 v13.6,41.9 | R26.2 12.4,42.2
MOTOR3  (via drill 0.3)
  Top-VerticalRoutes 0.254: v36.6,48.1 37.5,47.2 | 37.4,47.2 37.5,47.2 | 37.5,47.2 U$3.4 | U$3.4
  BottomnHorizontalroutes 0.254: RN1.3 v36.6,48.1
MOTOR3_2  (via drill 0.3)
  Top-VerticalRoutes 0.254: v34.5,38.9 32.9,38.9 32.7,38.7 30.9,38.7 27.8,41.8 15.5,41.8 v14.8,41.1 | IC1.11 8.6,23.9 6.9,25.6 6.9,27.1 v7.5,27.7
  BottomnHorizontalroutes 0.254: v34.5,38.9 35.3,38.9 36.5,40.1 36.5,40.4 C14.4 | v7.5,27.7 3.6,31.6 3.6,36.7 8,41.1 v14.8,41.1 R27.2
MOTOR4  (via drill 0.3)
  Top-VerticalRoutes 0.254: v37.4,48.9 37.4,48.3 37.7,48 40.03,48 U$3.5
  BottomnHorizontalroutes 0.254: RN1.4 v37.4,48.9
MOTOR4_2  (via drill 0.3)
  Top-VerticalRoutes 0.2: 24,36.7 26.7,36.7
  Top-VerticalRoutes 0.254: R28.2 7.75,20.05 7.75,21.7 8.65,22.6 IC1.9 10.3,22.6 11.8,21.1 14.5,21.1 16.5,23.1 16.6,23.1 16.6,32.8 20.5,36.7 24,36.7 | 26.7,36.7 27.6,35.9 30.8,35.9 33,38.1 v33.55,38.1
  BottomnHorizontalroutes 0.254: C14.3 37.3,40.2 35.2,38.1 v33.55,38.1
MOTOR6  (via drill 0.3)
  Top-VerticalRoutes 0.254: U$3.15 35.9,53.2 v35.5,52.8
  BottomnHorizontalroutes 0.254: v35.5,52.8 32.8,52.8 32.3,52.3 32.3,50.65 RN2.2
MOTOR7  (via drill 0.3)
  Top-VerticalRoutes 0.254: v33,52 31.91,50.91 U$3.36 U$3.35
  BottomnHorizontalroutes 0.254: v33,52 RN2.3
N$1
  BottomnHorizontalroutes 0.254: C15.7 33.2,47.2 33.8,47.8 RN2.5
N$2  (via drill 0.3 pad 0.25)
  Top-VerticalRoutes 0.2: IC2.2 31.6,20.45 31.6,21 31.4,21.2 29.2,21.2
  Top-VerticalRoutes 0.254: v27.4,40.2 26.6,41 v20.6,41 | v29,21.2 29.2,21.2
  BottomnHorizontalroutes 0.254: v27.4,40.2 27.4,39.5 23.9,36 23.9,19.5 24.5,18.9 25.9,18.9 28.2,21.2 v29,21.2 | 25.1,48.1 26.45,48.1 | 26.45,48.1 R16.1 26.6,48.15 26.6,48.1 | 26.6,48.1 26.6,46.5 26.95,46.15 C5.1 26.55,47.45 26.6,48.1 | 26.6,48.1 26.45,48.1 | 25.1,48.1 24.2,47.2 20.9,47.2 19.9,46.2 17.9,46.2 17.3,45.6 17.3,43.2 18.1,42.4 19.2,42.4 20.5,41.1 20.5,41 v20.6,41 | R1.1 28.05,53.4 24.8,53.4 23.95,52.45 R32.1 23.65,50.25 25.1,48.8 25.1,48.1
N$3
  BottomnHorizontalroutes 0.254: RN2.8 31.4,48 30.8,47.4 C15.10
N$4
  Top-VerticalRoutes 0.254: U101.11 52.95,34.6 R21.1
N$5
  BottomnHorizontalroutes 0.254: 50.1,25.7 50.75,25.7 R6.1 51.5,28.4 49.44,30.46 K2.1
N$6
  BottomnHorizontalroutes 0.254: R7.1 49.4,29.3 48.5,30.2 48.5,31.46 K2.3
N$7
  cutout GND: 13.5,52.4 13.4,50.2 14.9,49.1 16.9,49.1 17,49.3 17.2,49.2 18.6,50.5 18.5,52.4 18.5,52.6 17,54.1 16.2,54 15.5,53.3 14.7,53.3
N$8
  cutout GND: 17.8,9.3 14.5,9.3 13.3,8.2 13.4,5.8 14.2,5 14.7,4.7 16,3.8 17.6,3.8 19.1,5.5 19.1,7.9
N$9
  cutout 3V3&5V: 56.4,31.5 53.7,31.5 52.3,30.1 52.3,27.9 53.6,26.6 56.7,26.6 57.1,27.6 57,30.9
N$10  (via drill 0.3)  (1 unrouted)
  Top-VerticalRoutes 0.2: v29.4,54.9 30.15,54.9 arc-90 U$3.22
  BottomnHorizontalroutes 0.2: 28,54.9 v29.4,54.9
  BottomnHorizontalroutes 0.254: 27.9,55 28,54.9
N$11
  Top-VerticalRoutes 0.61: Q4.3 21.75,23.35 22.7,24.4 22.7,26.6 PAD3.1
  Top-VerticalRoutes 1.016: PAD10.1 23.3,24.3 PAD3.1
N$13
  BottomnHorizontalroutes 0.254: C121.6 43.6,36.2 43.8,36 43.8,35.56 K2.12
N$14
  cutout GND: 56.4,31.5 53.7,31.5 52.3,30.1 52.3,27.9 52.4,27.8 52.4,27.6 53.5,26.5 56,26.5 57.1,27.6 57.1,30.8
N$15
  BottomnHorizontalroutes 0.254: C121.5 44.4,36.7 44.5,36.6 44.5,36.3 44.9,35.9 44.9,35.84 K2.10
N$16
  Top-VerticalRoutes 0.813: R22.2 8.9,36.2 10.6,37.9 14.74,37.9 U$1.P$4
N$17
  BottomnHorizontalroutes 0.254: C121.10 RN7.8
N$18
  BottomnHorizontalroutes 0.254: RN7.7 C121.9
N$19
  BottomnHorizontalroutes 0.254: RN7.6 C121.8
N$21  (via drill 0.6)
  Top-VerticalRoutes 0.254: 27.2,23.25 PAD4.1 | PAD5.1 34.75,30.8 v35.45,30.85
  Top-VerticalRoutes 0.813: 23.6,21.1 26.25,21.1 v27.2,22.05 | R17.1 23.6,21.1 | 23.6,21.1 23.6,19.35 R12.1 | PAD6.1 PAD4.1
  Top-VerticalRoutes 1.016: PAD7.1 34.7,33.7 PAD5.1
  Top-VerticalRoutes 1.93: 27.2,23.25 v27.2,22.05 27.2,21.7
  BottomnHorizontalroutes 1.016: v35.45,30.85 34.3,30.85 34.3,30.9
  BottomnHorizontalroutes 1.27: 34.3,30.9 32.65,29.2 32.65,27.45 31.5,26.35 v27.2,22.05
N$22
  cutout 3V3&5V: 13.5,52.5 13.5,50.1 13.9,50.1 14.9,49.1 16.9,49.1 17,49 17.2,49 18.7,50.5 18.7,52.7 18.5,52.7 17.1,54.1 16.2,54.1 16.1,54.2 15.8,54.2 14.8,53.2 13.9,53.2 13.5,52.8
N$24
  BottomnHorizontalroutes 0.254: C121.3 46.1,36.6 46.9,35.8 46.8,34.86 K2.6
N$26
  BottomnHorizontalroutes 0.254: C121.4 45.2,36.4 45.8,35.8 45.8,34.96 K2.8
N$27
  Top-VerticalRoutes 0.305: IC1.3 IC1.2
N$28
  BottomnHorizontalroutes 0.254: RN2.7 32.2,48 31.6,47.4 C15.9
N$29
  BottomnHorizontalroutes 0.254: RN2.6 33,47.9 32.4,47.3 C15.8
N$30
  Top-VerticalRoutes 0.813: U$1.P$3 23.3,39.1 22.1,37.9 18,37.9 16,39.9 13.65,39.9 R23.2
N$32
  Top-VerticalRoutes 0.254: R38.1 28.55,51.2 U$3.25
N$33
  cutout 3V3&5V: 17.8,9.3 14.5,9.3 14.4,9.3 13.3,8.2 13.3,5.7 13.5,5.5 14.4,5.5 15.9,4 17.8,4 17.8,4.2 19.1,5.5 19.1,7.9 19.1,8
N$34
  Top-VerticalRoutes 1.016: R25.1 15.9,19.3 18.2,17 24.6,17 25.2,16.4 29.55,16.4 30.58,17.48 U$1.P$1
N$36
  Top-VerticalRoutes 1.27: U$1.P$2 23.37,14.9 16.1,14.9 15.5,15.5 11.7,15.5 R24.1
N$37  (via drill 0.3, 0.3 pad 0.25)
  Top-VerticalRoutes 0.254: PAD2.1 v35.5,27.6
  Top-VerticalRoutes 0.305: Q3.3 35.9,16.4 v35.9,17.3
  Top-VerticalRoutes 1.016: PAD9.1 34.7,24.7 PAD2.1
  BottomnHorizontalroutes 0.305: v35.9,17.3 36.4,17.8 36.4,26.8 v35.5,27.6
N$38
  Top-VerticalRoutes 0.254: Q4.1 18,25.75 R19.2
N$39  (via drill 0.3)
  Top-VerticalRoutes 0.254: v12.1,33.4 12.1,31.3 T1.1
  BottomnHorizontalroutes 0.254: v12.1,33.4 15.9,33.4 20.6,38.1 20.6,39.8 23.05,42.25 23.05,43.6 R13.2 22.45,44.4 R3.2
N$40
  Top-VerticalRoutes 0.254: Q2.3 20.3,29.1 | 23.25,30.55 23.25,30.85 PAD1.1
  Top-VerticalRoutes 0.813: 20.3,29.1 21.8,29.1 23.25,30.55
  Top-VerticalRoutes 1.016: PAD8.1 23.3,33.7 PAD1.1
N$41
  Top-VerticalRoutes 0.406: IC1.12 10.65,24.55 10.7,24.6
  Top-VerticalRoutes 0.813: 10.7,24.6 11.9,25.8 11.9,26.9 10.9,27.9 10.2,27.9 R22.1
N$42
  Top-VerticalRoutes 0.406: IC1.10 7.95,23.25 7.3,23.9
  Top-VerticalRoutes 0.813: R23.1 10.1,40 6,35.9 6,25.2 7.3,23.9
N$43  (via drill 0.3 pad 0.25)
  Top-VerticalRoutes 0.254: 27.75,19.2 R15.2 arc-90 27.95,18.8 v29.1,18.8 | Q3.1 34.4,14.05 v34.4,15.7
  BottomnHorizontalroutes 0.254: v29.1,18.8 29.6,19.3 31.4,19.3 34.4,16.3 v34.4,15.7
N$44
  Top-VerticalRoutes 0.254: R14.1 18.4,31.45 17.9,30.95 17.9,30.5 Q2.1
N$45
  Top-VerticalRoutes 0.406: 9.6,21.1 9.6,21.93 IC1.8
  Top-VerticalRoutes 0.813: 11.4,19.3 9.6,21.1
  Top-VerticalRoutes 1.27: R25.2 11.4,19.3
N$47
  Top-VerticalRoutes 0.254: U$3.18 33.5,54.55 33.5,55.9 32.9,56.5 R18.1
N$48
  Top-VerticalRoutes 0.305: IC1.6 2.95,22.6 2.55,22.1
  Top-VerticalRoutes 0.813: 2.9,19.9 2.9,20.8 2.5,21.3 2.5,22.05 2.55,22.1
  Top-VerticalRoutes 1.016: 2.9,19.9 7.2,15.6
  Top-VerticalRoutes 1.27: R24.2 7.2,15.6
N$57
  BottomnHorizontalroutes 0.254: RN1.8 C14.10
N$59
  BottomnHorizontalroutes 0.254: RN1.7 C14.9
N$62
  BottomnHorizontalroutes 0.254: RN1.6 C14.8
N$64
  BottomnHorizontalroutes 0.254: RN7.5 C121.7
N$65  (via drill 0.3 pad 0.25)
  Top-VerticalRoutes 0.254: Q3.2 37,13.55 v37,16.9
  Top-VerticalRoutes 0.406: R31.2 35.75,11.65 36.5,12.4 36.5,13.35 Q3.2
  BottomnHorizontalroutes 0.254: R35.2 41.7,44.35 41.7,39.1 38.6,36 38.6,35.3 38.3,35 37.9,35 36.8,33.9 36.8,28.4 37,28.2 v37,16.9
N$67
  BottomnHorizontalroutes 0.254: RN1.5 C14.7
N$70  (via drill 0.3)
  Top-VerticalRoutes 0.254: Q4.2 18.6,22.3 25.3,22.3 v25.5,22.2
  BottomnHorizontalroutes 0.254: R34.2 40.3,38.4 38.4,36.5 37.75,36.5 R4.2 35.1,34.05 27.05,34.05 25.5,32.5 v25.5,22.2
N$71  (via drill 0.3)
  Top-VerticalRoutes 0.813: C118.1 53.85,36.65 53.4,36.2 50.9,36.2 U101.12
  Top-VerticalRoutes 1.016: U101.12 44.8,36.1
  Top-VerticalRoutes 1.422: 44.8,36.1 43.3,34.6 43.3,30.7 v40.3,28.5
  BottomnHorizontalroutes 0.813: v40.3,28.5 40.3,27.05 R64.1
N$74  (via drill 0.6)
  Top-VerticalRoutes 0.254: 19.9,30.3 19.5,29.9 19.5,28.9 18.7,28.1 Q2.2 | R30.2 25.6,35.3
  Top-VerticalRoutes 0.406: 19.9,30.3 21.1,30.3 21.6,30.8 21.6,31.7 22.25,32.35 22.25,34.55 23,35.3 25.6,35.3 25.8,35.5 26.1,35.5 26.7,34.9 32,34.9 v33,35.9
  BottomnHorizontalroutes 0.2: 38.1,37 35.9,37
  BottomnHorizontalroutes 0.254: R36.2 38.8,44.15 38.8,37.7 38.1,37 | v33,35.9 34.1,37 35.9,37
N$77
  Top-VerticalRoutes 0.254: R9.1 R11.2
  Top-VerticalRoutes 0.406: C17.1 31.65,5.35 R9.1
N$79
  BottomnHorizontalroutes 0.254: Q104.3 44.5,25.2 43.9,24.6 43.9,23.6 | 43.9,23.6 Q103.1 | R117.1 44,23.7 43.9,23.6
N$123
  BottomnHorizontalroutes 0.61: Q103.3 40.6,22.8 40.6,24.7 R64.2
PWMB  (via drill 0.3 pad 0.25)
  Top-VerticalRoutes 0.254: R14.2 20.7,31.75 20.7,32.35 21.35,33 v21.35,34.2
  BottomnHorizontalroutes 0.2: 21.5,39.8 21.5,34.35 v21.35,34.2
  BottomnHorizontalroutes 0.254: C15.6 30.8,43.9 | 30.8,43.9 30.8,43.8 30.9,43.9 30.8,43.9 | 30.8,43.9 29.4,42.5 24.2,42.5 21.5,39.8 | v21.35,34.2 21.5,34.2
PWMG  (via drill 0.3)
  Top-VerticalRoutes 0.254: v21.4,27.9 21.4,27.25 R19.1
  BottomnHorizontalroutes 0.254: C15.5 31.6,43.2 31.3,42.9 30.6,42.9 29.6,41.9 27,41.9 26,40.9 26,39.6 22.3,35.9 22.3,28.8 v21.4,27.9
PWMR  (via drill 0.3 pad 0.25)
  Top-VerticalRoutes 0.254: R15.1 25.15,19.3 v24.8,19.7
  BottomnHorizontalroutes 0.254: C15.4 32.4,41.5 31.7,40.8 31.3,40.8 30.7,40.2 30.7,36.4 29.6,35.3 26.1,35.3 24.6,33.8 24.6,19.9 v24.8,19.7
RST_BT  (via drill 0.3)
  Top-VerticalRoutes 0.254: R21.2 55.2,33.8 v56.3,33.8
  BottomnHorizontalroutes 0.2: K2.9 45.44,33.24 45.7,33.5 56,33.5 v56.3,33.8
RX_BT  (via drill 0.3)
  Top-VerticalRoutes 0.254: U101.2 52.7,21.1 v52.8,21
  BottomnHorizontalroutes 0.254: v52.8,21 52.8,22.75 R6.2
SENS_ENABLE  (via drill 0.3)  (1 unrouted)
  Top-VerticalRoutes 0.254: v34.9,50.7 32.9,48.7 32.9,45.7 33.4,45.2 33.4,43.17
  BottomnHorizontalroutes 0.254: RN2.4 33.95,50.7 v34.9,50.7
SENSOR_ENABLE  (via drill 0.3, 0.3 pad 0.25)
  Top-VerticalRoutes 0.254: v31.7,40 31,40 27.7,43.3 v16.5,43.3 11,43.3 3.7,36 3.7,25.9 | 3.7,25.9 3.7,25.8 | 3.45,25.85 IC1.1 3.73,25.88 3.7,25.9
  BottomnHorizontalroutes 0.254: v31.7,40 31.8,40 | v16.5,43.3 16.5,46.65 R47.2
  BottomnHorizontalroutes 0.305: C15.3 33.2,41.4 31.8,40
SS1  (via drill 0.3)
  Top-VerticalRoutes 0.254: U$3.24 | U$3.24 31.9,52 32.6,52.7 33.6,52.7 34.8,51.5 35.3,51.5 35.7,51.1 35.7,50.3 35.2,49.8 34.9,49.8 34.3,49.2 34.3,47.3 37,44.6 38.5,44.6 39.1,44 v45.2,44
  BottomnHorizontalroutes 0.254: RN7.3 v45.2,44
TEMPERATURE  (via drill 0.3)
  Top-VerticalRoutes 0.254: TR102.1 24.04,51.71 R38.2 24.4,51.2 24.1,50.8 24.1,49.65 C40.1 24.55,49.05 v23.4,48
  BottomnHorizontalroutes 0.254: R47.1 18.95,47.45 19,47.4 R47.1 | R47.1 18.8,47.4 19,47.8 23.2,47.8 v23.4,48
TX_BT  (via drill 0.3)
  Top-VerticalRoutes 0.254: v52.9,19.6 U101.1
  BottomnHorizontalroutes 0.254: R7.2 49.35,24.05 49.7,23.6 49.7,22.8 v52.9,19.6
VDDCORE
  Top-VerticalRoutes 0.406: U$3.23 28.25,52.8 28,52.8 27.85,52.95 C117.1

## Text on the board
Top-VerticalRoutes: TOP COPPER
GND: INNER COPPER #1
3V3&5V: INNER COPPER #2
BottomnHorizontalroutes: A+T LTD | (c) 2016 | ANAL_1_STEP | REV1.1 | BOTTOM COPPER
tPlace: 1
tNames: ANAL_1_STEP | REV 1.1 | A+T LTD | (c) 2016 | TOP SILK
bNames: BOTTOM SILK
tStop: TOP RESIST
bStop: BOTTOM SOLDER RESIST
tCream: TOP PASTE MASK
bCream: BOTTOM PASTE MASK